# EAGLE board node board (EAGLE 7.5.0)
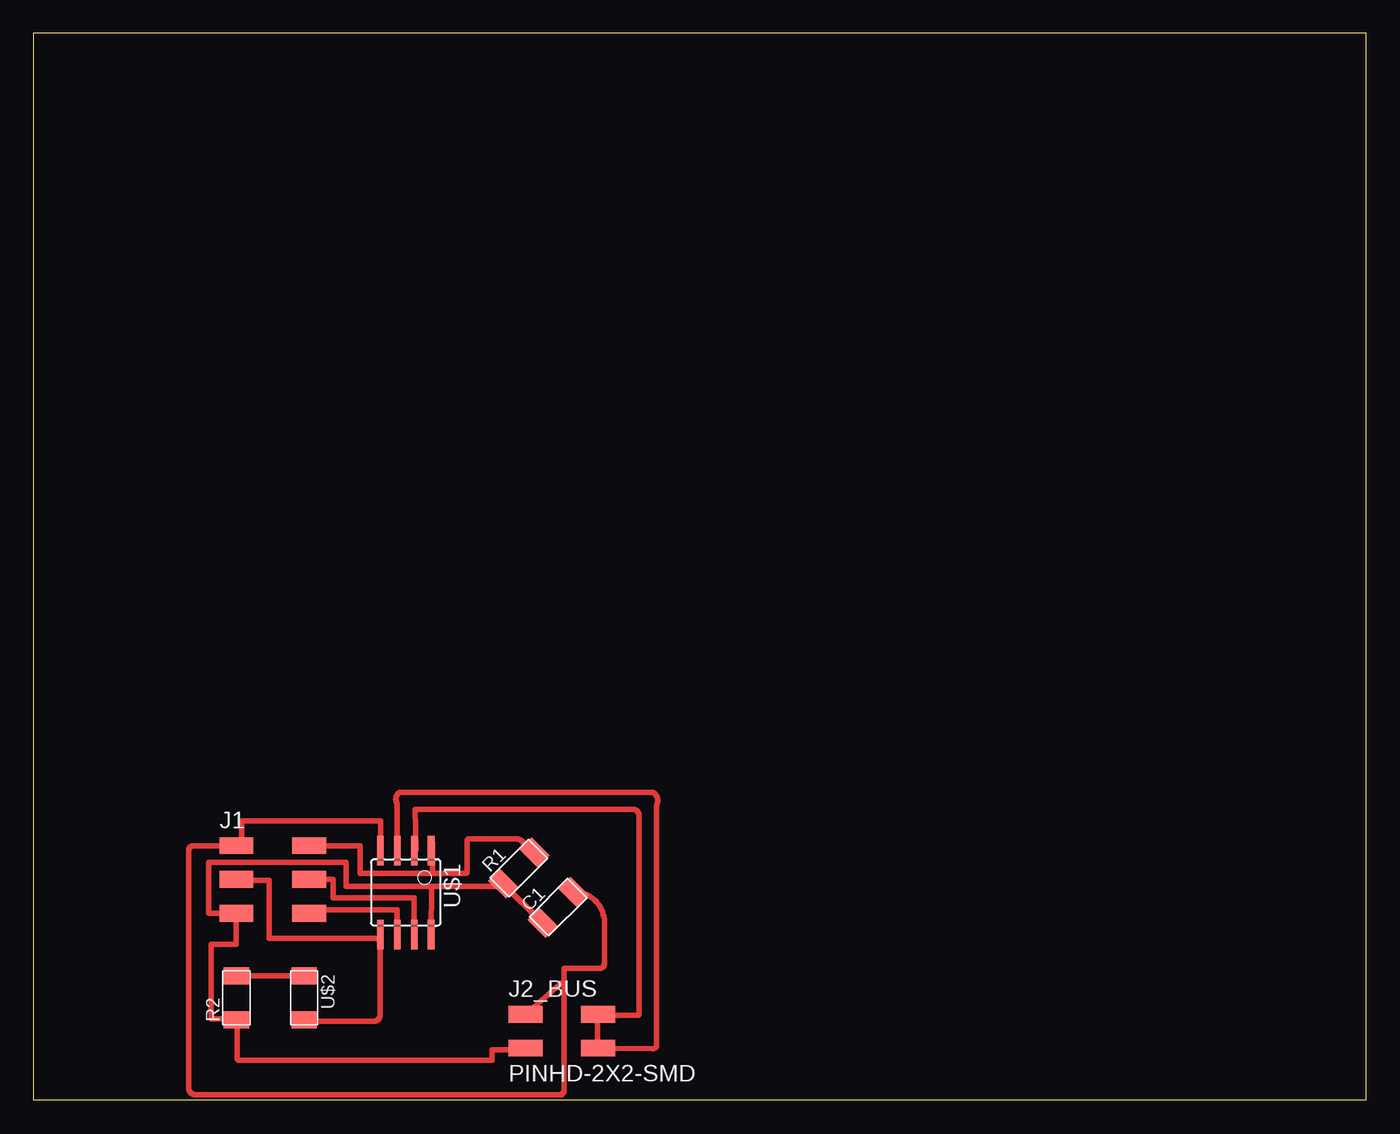
[diagram p0: board, top side]

Size 100 x 80 mm. Coordinates in mm from the lower left corner, seen from the top.
Outline: 0,0 100,0 100,80 0,80 0,0
Copper layers (1*16): Top 0.035mm / dielectric 1.5mm / Bottom 0.035mm
Design rules "default": minimum track width 10mil, minimum drill 24mil, track to track 8mil, track to pad 8mil, pad to pad 8mil, via to via 8mil, smd to smd 8mil, copper to edge 40mil, drill to drill 8mil, minimum pad ring 10mil, minimum via ring 8mil, stop-mask expansion 4mil, vias tented up to drill 0mil, thermal gap 10mil

## Footprints (pad centres in the part's own frame; a part is rotated, then mirrored left to right if it is on the bottom)
C1206FAB = smd 1.27 x 1.905: 1 -1.651,0; 2 1.651,0
2X03SMD = smd 2.54 x 1.27: 1 -2.54,2.54; 2 2.92,2.54; 3 -2.54,0; 4 2.92,0; 5 -2.54,-2.54; 6 2.92,-2.54
2X02SMD = smd 2.54 x 1.27: 1 -2.54,1.27; 2 2.92,1.27; 3 -2.54,-1.27; 4 2.92,-1.27
R1206FAB = smd 1.27 x 1.905: 1 -1.651,0; 2 1.651,0
SOIC8 = smd 0.5 x 2.2: 1 -1.905,-3.154; 2 -0.645,-3.154; 3 0.625,-3.154; 4 1.895,-3.154; 5 1.905,3.154; 6 0.635,3.154; 7 -0.635,3.154; 8 -1.905,3.154
LED1206FAB = smd 1.27 x 1.905: 1 -1.651,0; 2 1.651,0

## Placement (x,y rotation side)
C1  1uf  [C1206FAB]  39.37,14.42 45 top
J1  ISP  [2X03SMD]  17.78,16.51 0 top
J2_BUS  PINHD-2X2-SMD  [2X02SMD]  39.46,5.13 0 top
R1  10k  [R1206FAB]  36.43,17.37 45 top
R2  1k  [R1206FAB]  15.24,7.62 90 top
U$1  ATTINY45SI  [SOIC8]  27.94,15.53 180 top
U$2  LEDFAB1206  [LED1206FAB]  20.32,7.62 270 top

## Library data of the parts
C1 J1 J2_BUS R1 R2 U$1 U$2 = fab

## Nets
A: R2.2 U$2.1
C: J1.3 U$1.5 U$2.2
GND: C1.2 J1.1 J2_BUS.1 U$1.4
MISO: J1.6 U$1.6
RST: J1.2 R1.2 U$1.1
RX: J2_BUS.4 U$1.3
SCK: J1.4 U$1.7
TX: J2_BUS.2 U$1.2
VCC: C1.1 J1.5 J2_BUS.3 R1.1 R2.1 U$1.8

## Tracks (layer width: path | path; a pad name or v marks a point on that pad's centre or on a via)
A
  Top 0.406: U$2.1 R2.2
C
  Top 0.406: U$1.5 26.04,12.09 17.69,12.09 17.69,16.45 15.3,16.45 J1.3 | U$1.5 | U$2.2 20.32,6.04 arc90 20.5,5.87 25.51,5.87 arc90 26.04,6.39 U$1.5
GND
  Top 0.406: U$1.4 26.05,20.89 arc-90 26.05,20.89 15.65,20.89 15.65,19.46 arc-90 J1.1 15.24,19.02 12.18,19.02 arc90 11.65,18.76 11.65,0.89 arc90 12.18,0.36 39.65,0.36 arc-90 39.83,0.53 39.83,8.89 | 39.83,8.89 39.83,9.84 42.49,9.84 arc90 42.85,10.2 42.85,13.28 arc90 C1.2 40.88,15.21 | J2_BUS.1 39.83,8.89
MISO
  Top 0.406: U$1.6 27.29,14.22 20.7,14.22 J1.6
RST
  Top 0.406: U$1.1 29.87,18.69 29.87,19.29 29.96,19.29 29.96,16.98 | 37.23,19.24 R1.2 36.96,18.77 arc90 36.17,19.56 32.72,19.56 arc90 32.55,19.39 32.55,17.08 arc-90 32.45,16.98 29.96,16.98 | J1.2 20.7,19.02 24.54,19.02 24.54,16.98 29.96,16.98
RX
  Top 0.406: 27.29,18.69 U$1.3 arc90 27.38,18.75 arc-90 27.29,18.84 27.29,22.23 arc-90 27.47,23.04 46.49,23.04 arc-90 46.77,22.12 46.77,4.13 arc-90 46.46,3.81 J2_BUS.4 42.29,6.31
SCK
  Top 0.406: J1.4 22.49,16.51 22.49,15.11 28.57,15.11 U$1.7
TX
  Top 0.406: U$1.2 arc90 28.71,18.82 28.63,21.78 45.07,21.78 arc-90 45.43,21.07 45.43,6.4 arc-90 45.34,6.31 42.94,6.31 arc90 42.85,6.4 J2_BUS.2
VCC
  Top 0.406: C1.1 R1.1 35.06,16 29.87,16 | U$1.8 29.87,16 | 29.87,16 23.47,16 23.47,17.78 13.16,17.78 13.16,13.96 15.24,13.96 J1.5 15.2,13.97 15.2,11.65 13.34,11.65 13.34,6.04 15.24,6.04 R2.1 arc-90 15.38,5.83 arc90 15.29,5.74 15.29,3.11 arc90 15.47,2.93 34.4,2.93 34.4,3.73 36.92,3.73 J2_BUS.3